# Altium PCB STM32F103RC.PcbDoc
Units mil, origin at the board's own origin, x right, y up, seen from the top; angles counter-clockwise.
Board outline 3690.03 x 4351.02 mil, 2 copper layers (Top Layer, Bottom Layer); 8 components, 0 nets, 84 pads, 0 vias.
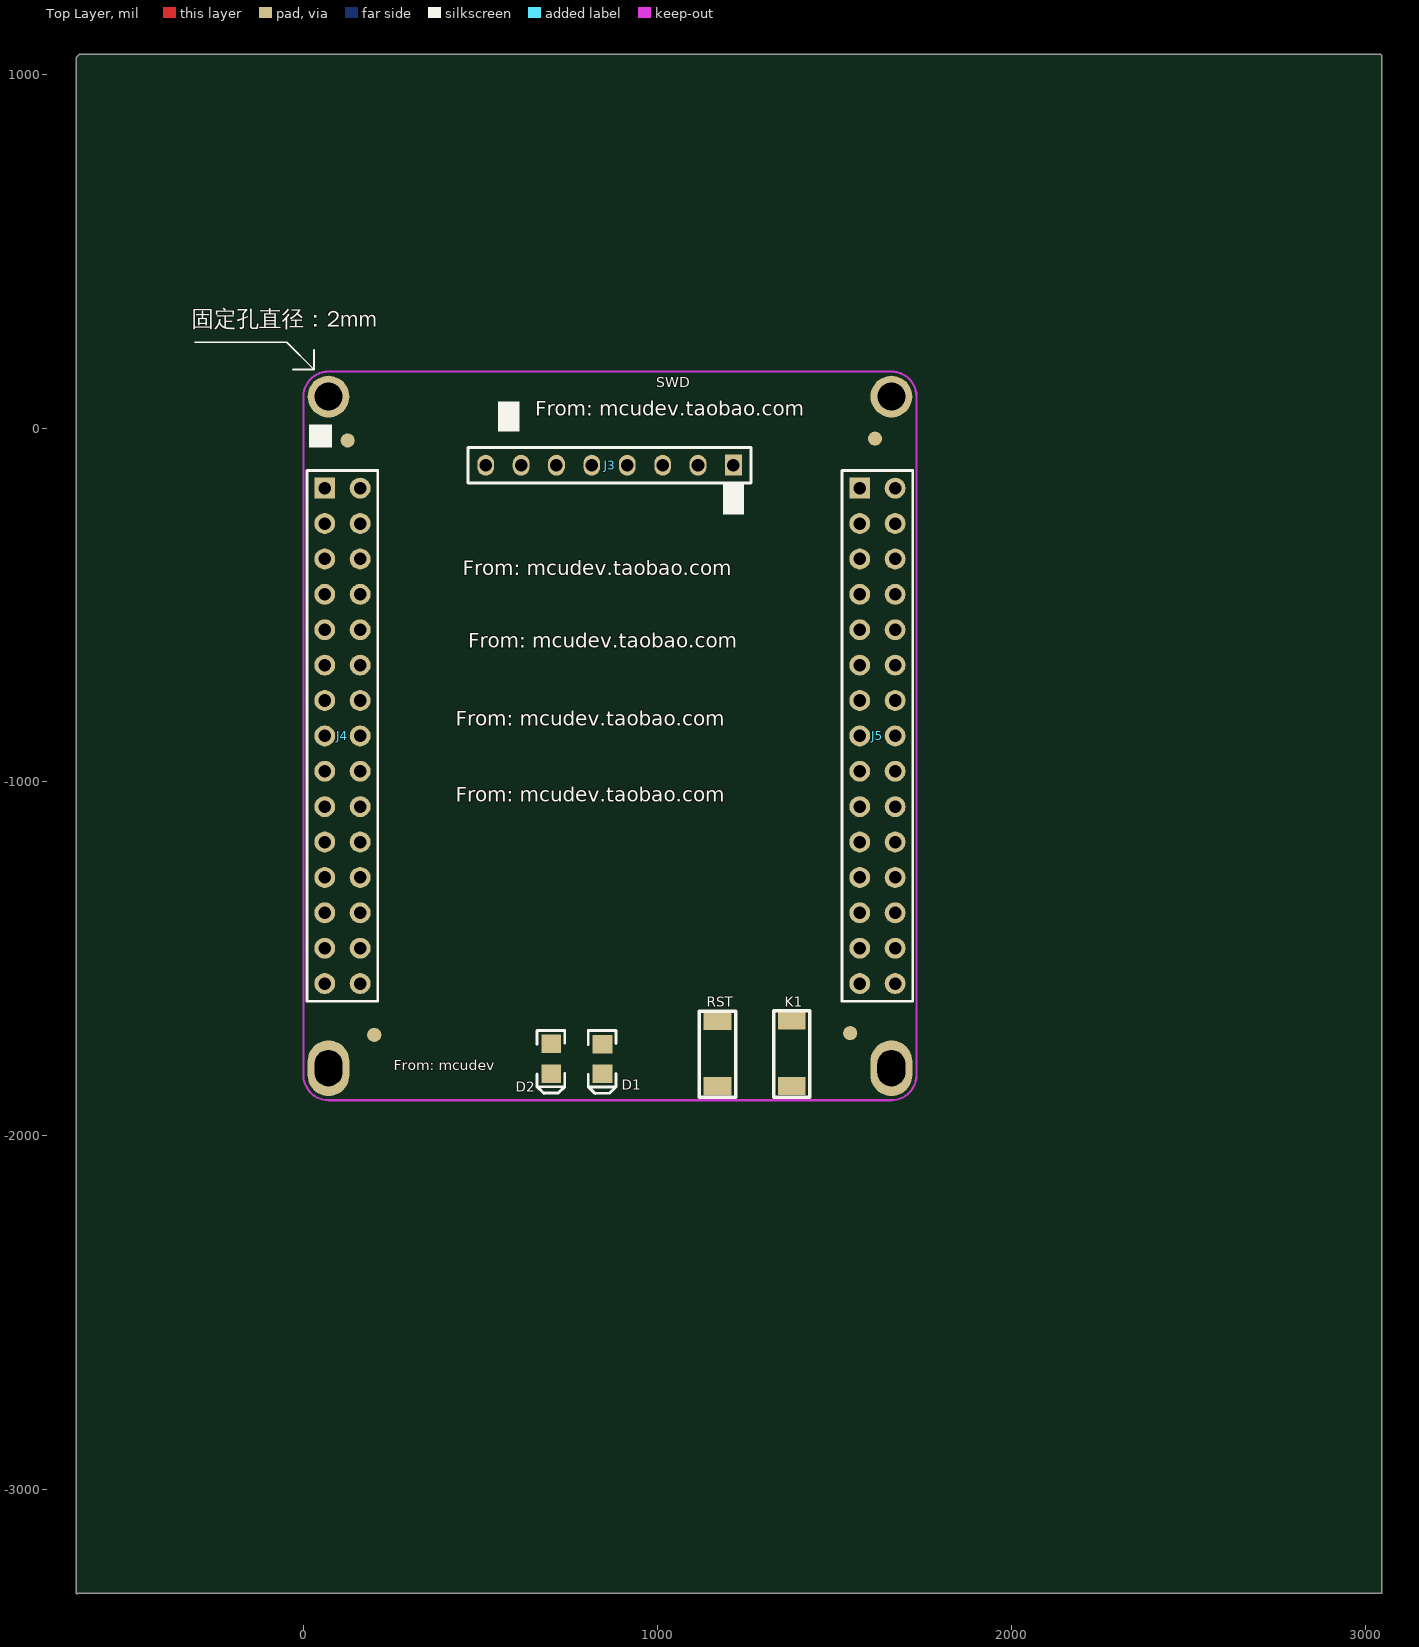
[diagram p0: Top Layer view]
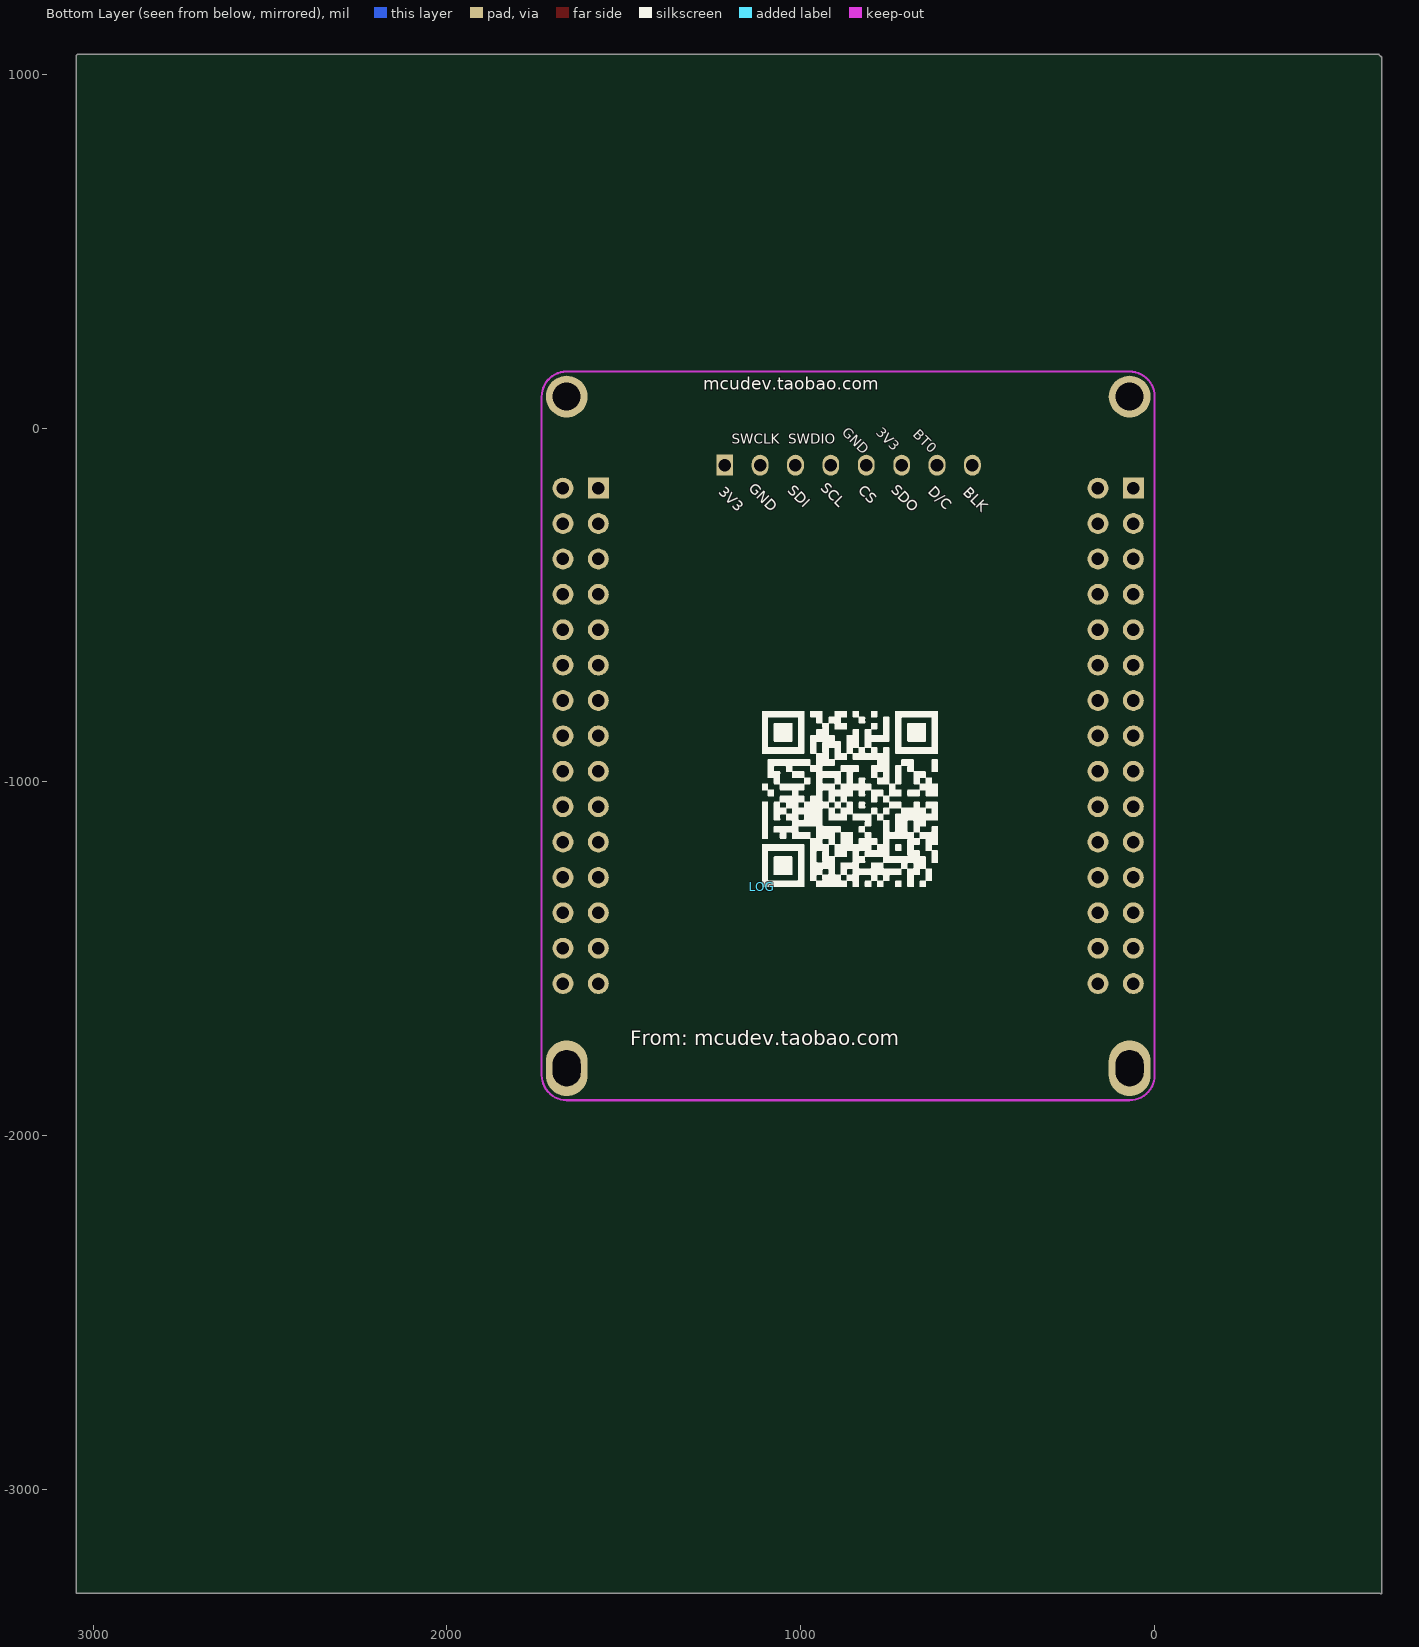
[diagram p1: Bottom Layer view, seen from below]

## Layer stack, top to bottom
Top Layer: signal copper 1.4
Dielectric: core 12.6, FR-4, Dk 4.8
Bottom Layer: signal copper 1.4

## Board outline
-642.31,-3292 -642.31,1046 cw(c-639.79,1046) -641.57,1047.78 -633.57,1055.78 cw(c-631.79,1054) -631.79,1056.52 3042.21,1056.52 cw(c3042.21,1054) 3043.99,1055.78 3046.99,1052.78 cw(c3045.21,1051) 3047.72,1051 3047.72,-3291 cw(c3045.21,-3291) 3045.21,-3293.51 -637.78,-3293.51 cw(c-639.79,-3292)

## Design rules (kind name [scope] priority, off if disabled: settings)
Clearance [All] p1: gap=16
ComponentClearance [All] p1: gap=1 collisioncheckmode=3 verticalgap=1 showdistances=FALSE
FabricationTestpoint [(IsPad And (OnTopLayer Or OnBottomLayer))] p1: side=3 testpointundercomponent=TRUE minsize=40 maxsize=100 preferedsize=60 minholesize=0 maxholesize=40 preferedholesize=32 testpointgrid=1 allowsidetop=TRUE allowsidebottom=TRUE usegrid=TRUE gridtolerance=0.01
HoleSize [All] p1: absolutevalues=TRUE maxlimit=200 minlimit=1 maxpercent=80.000 minpercent=20.000
MinimumSolderMaskSliver [All] p1: minsoldermaskwidth=1
PlaneConnect [All] p1: planeconnectstyle=Relief reliefexpansion=10 reliefentries=4 reliefconductorwidth=10 reliefairgap=10
PolygonConnect PolygonConnect_1 [(InPadClass('All Pads'))] p1: connectstyle=Relief reliefconductorwidth=10 reliefentries=4 polygonreliefangle="90 Angle"
PolygonConnect [All] p2: connectstyle=Direct reliefconductorwidth=10 reliefentries=4 polygonreliefangle="90 Angle"
RoutingVias [All] p1: holewidth=12 width=24 viastyle="Through Hole" minholewidth=12 minwidth=24 maxholewidth=12 maxwidth=24
SilkToSilkClearance [All] p1: silktosilkclearance=1
SilkscreenOverComponentPads [All] p1: minsilkscreentomaskgap=1
SolderMaskExpansion [All] p1: expansion=4
Width [All] p1: maxlimit=40 minlimit=8 preferedwidth=8 minimp=50.000000 maximp=50.000000 favimp=50.000000
21 further rules are at their usual default settings.

## Components (designator, comment, footprint, x,y, rotation, side; value= is the part's Value field where it differs from the comment)
D1 "LED" LED0805 840,-1825 r270 top
D2 "LED" LED0805 695.21,-1824.37 r270 top
J3 "OLED/TFT" SPI_1X8 1215,-105 r180 top
J4 "P2x15-2.54mm" IDE15X2_2.54 60.21,-170 r270 top
J5 "P2x15-2.54mm" IDE15X2_2.54 1572.08,-170 r270 top
K1 "SW" SMD3x4x2MM 1380,-1674.37 r0 top
LOG "Comment" 500x500-mcudev-log 1109,-1297 r180 bottom
RST "" SMD3x4x2MM 1170,-1675 r0 top

## Footprints (in the part's own frame and the unit in brackets; to place one, negate y for a bottom-side part, rotate by r counter-clockwise, add the part's x,y. Pads: shape width x height; smd on the part's side, far side on the other; paste and mask are expansions set on the pad)
500x500-mcudev-log [mil]
  silkscreen extent 0,0 496,495
IDE15X2_2.54 [mm]
  rect 1.5x1.5 hole 0.9: 1(0,0)
  round 1.5 hole 0.9: 2(0,2.54) 3(2.54,0) 4(2.54,2.54) 5(5.08,0) 6(5.08,2.54) 7(7.62,0) 8(7.62,2.54) 9(10.16,0) 10(10.16,2.54) 11(12.7,0) 12(12.7,2.54) 13(15.24,0) 14(15.24,2.54) 15(17.78,0) 16(17.78,2.54) 17(20.32,0) 18(20.32,2.54) 19(22.86,0) 20(22.86,2.54) 21(25.4,0) 22(25.4,2.54) 23(27.94,0) 24(27.94,2.54) 25(30.48,0) 26(30.48,2.54) 27(33.02,0) 28(33.02,2.54) 29(35.56,0) 30(35.56,2.54)
  silkscreen extent -1.27,-1.27 36.83,3.81
LED0805 [mil]
  rect 52x56 smd: 1(-84,5) 2(0,5)
  silkscreen extent -122,-35 56,43
SMD3x4x2MM [mm]
  rect 2x1.3 smd paste+0 mask+0.2: 1(0,0) 2(0,-4.7)
  silkscreen extent -1.3,-5.51 1.3,0.69
SPI_1X8 [mm] "Connector; Header; 8 Position"
  rect 1.2x1.5 hole 0.9: 1(0,0)
  oval 1.2x1.5 hole 0.9: 2(2.54,0) 3(5.08,0) 4(7.62,0) 5(10.16,0) 6(12.7,0) 7(15.24,0) 8(17.78,0)
  silkscreen extent -1.27,-1.27 19.05,1.27

## Part data
J3: library part "Header 8", "Header, 8-Pin"
J4 J5: library part "Header 15X2", "Header, 15-Pin, Dual row"
K1: library part SW-SPST, "Single-Pole, Single-Throw Switch"
RST: library part SW-PB

## Free pads (board coordinates)
  oval 118.11x157.48 hole 78.74 slot 102.36 at 90 deg: ""(70.71,-1809.18) ""(1661.57,-1809.18)
  round 118.11 hole 78.74: ""(70.71,88.87) ""(1661.57,88.87)
  round 40 smd: ""(125,-35) ""(200,-1715) ""(1545,-1710) ""(1615,-30)

## Nets (pads, with @x,y where several pads share a name; then routed paths per layer and width w, separated by ;. In a path a pad name is that pad's centre, name@x,y a point inside that pad or via, vN(x,y) a via of type N, cw(c..) or ccw(c..) an arc to the next point about the centre after c; other vN are vias at no path point)
pads on no net: D1.1 D1.2 D2.1 D2.2 J3.1 J3.2 J3.3 J3.4 J3.5 J3.6 J3.7 J3.8 J4.1 J4.2 J4.3 J4.4 J4.5 J4.6 J4.7 J4.8 J4.9 J4.10 J4.11 J4.12 J4.13 J4.14 J4.15 J4.16 J4.17 J4.18 J4.19 J4.20 J4.21 J4.22 J4.23 J4.24 J4.25 J4.26 J4.27 J4.28 J4.29 J4.30 J5.1 J5.2 J5.3 J5.4 J5.5 J5.6 J5.7 J5.8 J5.9 J5.10 J5.11 J5.12 J5.13 J5.14 J5.15 J5.16 J5.17 J5.18 J5.19 J5.20 J5.21 J5.22 J5.23 J5.24 J5.25 J5.26 J5.27 J5.28 J5.29 J5.30 K1.1 K1.2 RST.1 RST.2

## Keep-outs
Keep-Out Layer:
  lines w6: 0,-1828.87 ccw(c70.71,-1828.87) 70.71,-1899.58 1661.57,-1899.58 ccw(c1661.57,-1828.87) 1732.28,-1828.87 1732.28,88.87 ccw(c1661.57,88.87) 1661.57,159.58 70.71,159.58 ccw(c70.71,88.87) 0,88.87 0,-1828.87

## Silkscreen, mask and mechanical layers (free items; w line width, h text height)
Top Overlay:
  rectangle: 550,-10 610,75
  rectangle: 15,-55 80,10
  rectangle: 1185,-245 1245,-160
  lines w5: -307.5,242.5 -47.5,242.5 29.67,165.33 ; -30.33,165.33 29.67,165.33 ; 29.67,220.33 29.67,165.33
  text "固定孔直径：2mm" at -315,270 h80
  text "SWD" at 997,106 h50
  text "From: mcudev.taobao.com" at 655,20 h70
  text "From: mcudev.taobao.com" at 450,-430 h70
  text "From: mcudev.taobao.com" at 465,-635 h70
  text "From: mcudev.taobao.com" at 430,-855 h70
  text "From: mcudev.taobao.com" at 430,-1070 h70
  text "From: mcudev" at 255,-1825 h50
Bottom Overlay:
  text "mcudev.taobao.com" at 1275,95 h60
  text "3V3" at 790,-15 h28 r45
  text "GND" at 885,-15 h28 r45
  text "BT0" at 685,-20 h28 r45
  text "SWDIO" at 1035,-45 h28
  text "SWCLK" at 1195,-45 h28
  text "SCL" at 947,-172 h30 r45
  text "GND" at 1150,-173 h30 r45
  text "SDO" at 747,-177 h30 r45
  text "CS" at 840,-178 h30 r45
  text "SDI" at 1040,-178 h30 r45
  text "D/C" at 643,-181 h30 r45
  text "3V3" at 1235,-183 h30 r45
  text "BLK" at 543,-184 h30 r45
  text "From: mcudev.taobao.com" at 1482,-1759 h70

## Dimensions
70.71,-1809.18 to 1661.57,-1809.18 on Top Overlay
1732.28,-1828.87 to 0,-1828.87 on Top Overlay
1661.57,88.87 to 1661.57,-1809.18 on Top Overlay
1661.57,159.58 to 1661.57,-1899.58 on Top Overlay